# Altium PCB JTAG Breakout Breadboard.PcbDoc
Units mil, origin at the board's own origin, x right, y up, seen from the top; angles counter-clockwise.
Board outline 660 x 1300 mil, 2 copper layers (Top Layer, Bottom Layer), stack 61.756 mil thick; 3 components, 20 nets, 40 pads, 20 vias.
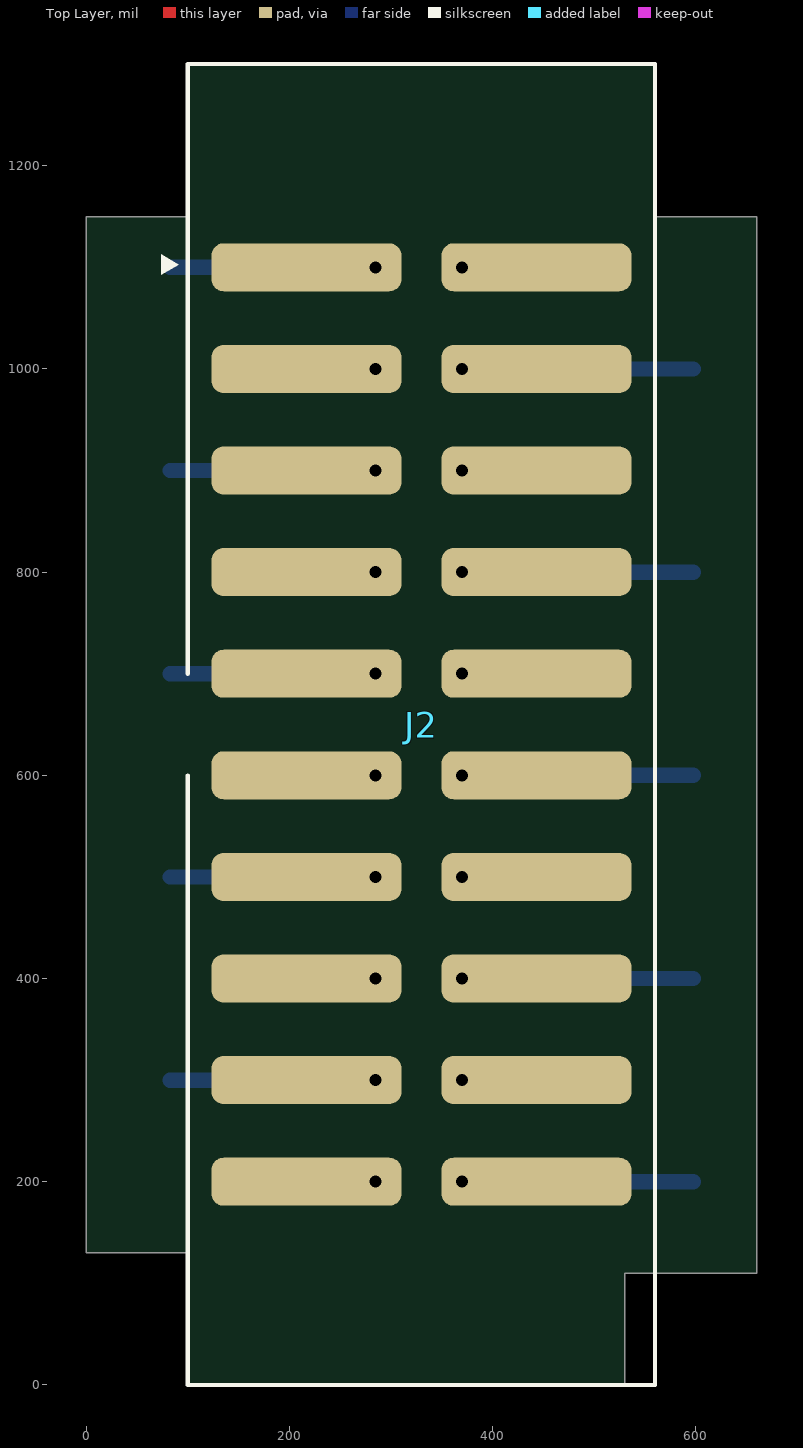
[diagram p0: Top Layer view]
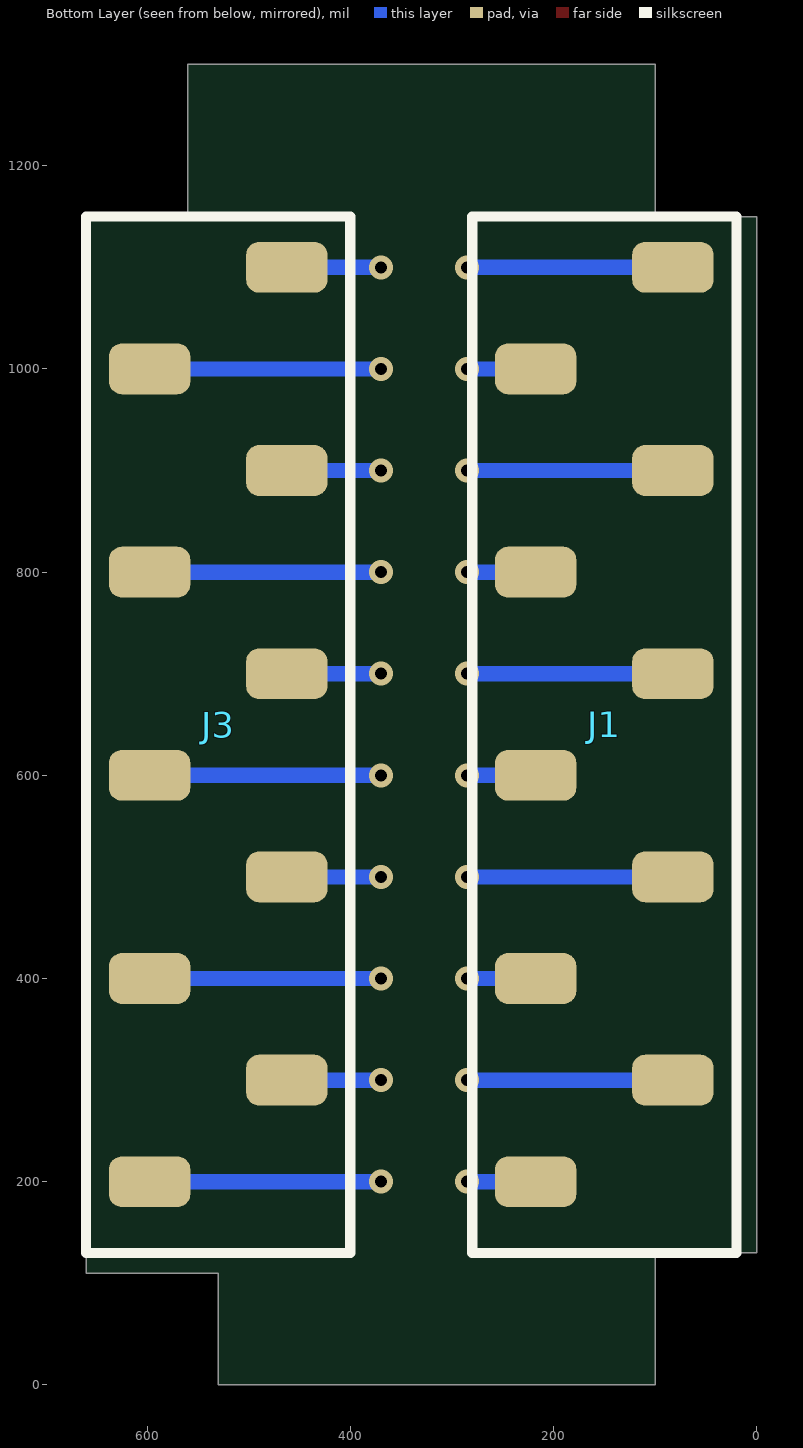
[diagram p1: Bottom Layer view, seen from below]

## Layer stack, top to bottom
Top Solder: solder mask 1, PSR-4000BN, Dk 4.5
Top Layer: signal copper 1.378
Dielectric 1: core 59, Kingboard KB6167F, Dk 4.5
Bottom Layer: signal copper 1.378
Bottom Solder: solder mask 1, PSR-4000BN, Dk 4.5

## Board outline
0,129.99 0,1149.99 100,1149.99 100,1299.99 560,1299.99 560,1149.99 660,1149.99 660,109.99 530,109.99 530,-0.01 100,-0.01 100,129.99

## Design rules (kind name [scope] priority, off if disabled: settings)
BoardOutlineClearance [All] p1: gap=7.87 ignorepadtopadclearanceinfootprint=FALSE
Clearance [All] p1: gap=5 ignorepadtopadclearanceinfootprint=FALSE except(9.84: Arc-Hole Track-Hole SMDPad-Hole THPad-Hole Via-Hole Fill-Hole Poly-Hole Region-Hole Text-Hole)
ComponentClearance [All] p1: gap=5 collisioncheckmode=3 verticalgap=5 showdistances=TRUE
DiffPairsRouting [All] p1: maxlimit=10 minlimit=5 mostfreqgap=5 toplayer_minwidth=5 toplayer_maxwidth=1000 toplayer_prefwidth=5 bottomlayer_minwidth=5 bottomlayer_maxwidth=1000 bottomlayer_prefwidth=5 maxuncoupledlength=500
Height [All] p1: minheight=0 maxheight=71497.94 prefheight=500
HoleSize [All] p1: absolutevalues=TRUE maxlimit=248.03 minlimit=11.81 maxpercent=80.000 minpercent=20.000
HoleToHoleClearance [All] p1: gap=9.84 allowstackedmicrovias=FALSE
MinimumAnnularRing [All] p1: minimumring=3
MinimumSolderMaskSliver [All] p1: minsoldermaskwidth=0
PlaneClearance [All] p1: clearance=5
PlaneConnect PlaneConnectPowerPads [InPadClass('PowerPads')] p1: planeconnectstyle=Direct reliefexpansion=20 reliefentries=4 reliefconductorwidth=10 reliefairgap=10
PlaneConnect [All] p2: pad.planeconnectstyle=Relief pad.reliefexpansion=11.81 pad.reliefentries=4 pad.reliefconductorwidth=5 pad.reliefairgap=5 via.planeconnectstyle=Direct via.reliefexpansion=11.81 via.reliefentries=4 via.reliefconductorwidth=5 via.reliefairgap=5
PolygonConnect PolygonConnectPowerPads [All vs (InPadClass('PowerPads'))] p1: connectstyle=Direct reliefconductorwidth=10 reliefentries=4 polygonreliefangle="90 Angle" airgapwidth=10
PolygonConnect [All] p2: thpad.connectstyle=Relief thpad.reliefconductorwidth=5 thpad.reliefentries=4 thpad.polygonreliefangle="90 Angle" thpad.airgapwidth=5 smdpad.connectstyle=Relief smdpad.reliefconductorwidth=5 smdpad.reliefentries=4 smdpad.polygonreliefangle="90 Angle" smdpad.airgapwidth=5 via.connectstyle=Direct via.reliefconductorwidth=5 via.reliefentries=4 via.polygonreliefangle="90 Angle" via.airgapwidth=5
RoutingVias [All] p1: holewidth=11.81 width=23.62 viastyle="Through Hole" minholewidth=11.81 minwidth=23.62 maxholewidth=23.62 maxwidth=259.84
SilkToSilkClearance [All] p1: silktosilkclearance=0
SilkToSolderMaskClearance [IsPad] p1: minsilkscreentomaskgap=5 clearancetoexposedcopper=TRUE
SolderMaskExpansion ViaTent [IsVia] p1: expansion=4 istentingtop=TRUE
SolderMaskExpansion [All] p2: expansion=4 istentingtop=FALSE
Width [All] p1: maxlimit=1000 minlimit=5 preferedwidth=5 minimp=50.000000 maximp=50.000000 favimp=50.000000
20 further rules are at their usual default settings.

## Components (designator, comment, footprint, x,y, rotation, side; value= is the part's Value field where it differs from the comment)
J1 "10 contacts Male header" 10129380-910001ALF 150,649.99 r270 bottom
J2 "Arm® JTAG 20 connector" "3020-20-0300-00 PLUGMID" 330,649.99 r90 top locked
J3 "10 contacts Male header" 10129380-910001ALF 530,649.99 r270 bottom locked

## Footprints (in the part's own frame and the unit in brackets; to place one, negate y for a bottom-side part, rotate by r counter-clockwise, add the part's x,y. Pads: shape width x height; smd on the part's side, far side on the other; paste and mask are expansions set on the pad)
"3020-20-0300-00 PLUGMID" [mm]
  rrect50% 1.2x4.75 smd: 1(11.43,2.875) 2(11.43,-2.875) 3(8.89,2.875) 4(8.89,-2.875) 5(6.35,2.875) 6(6.35,-2.875) 7(3.81,2.875) 8(3.81,-2.875) 9(1.27,2.875) 10(1.27,-2.875) 11(-1.27,2.875) 12(-1.27,-2.875) 13(-3.81,2.875) 14(-3.81,-2.875) 15(-6.35,2.875) 16(-6.35,-2.875) 17(-8.89,2.875) 18(-8.89,-2.875) 19(-11.43,2.875) 20(-11.43,-2.875)
  silkscreen extent -16.51,-5.84 16.51,6.5, body extent -16.51,-8.89 16.51,8.89, height 12.47
10129380-910001ALF [mil]
  rrect50% 50x80 smd: 1(-450,67.5) 2(-350,-67.5) 3(-250,67.5) 4(-150,-67.5) 5(-50,67.5) 6(50,-67.5) 7(150,67.5) 8(250,-67.5) 9(350,67.5) 10(450,-67.5)
  silkscreen extent -500,-130 520,130, body extent -500,-94 500,95, height 390

## Part data
J1 J3: library part 10129380-910001ALF, "Connector Male Header 1X10 vertical 10contacts 0.100in pitch Gold finish SMD", Manufacturer=FCI, Supplier Part Number 1=609-10129380-910001ALFCT-ND, ComponentLink1Description="Manufacturer Website", ComponentLink1URL=http://www.fci.com, ComponentLink2Description="Component Datasheet", ComponentLink2URL=https://cdn.amphenol-icc.com/media/wysiwyg/files/drawing/10129380.pdf, ComponentLink3Description="Octopart Link", ComponentLink3URL=https://octopart.com/10129380-910001alf-amphenol+icc+%2F+fci-87314063?r=sp, Contact Finish=Gold, Description in Visual="Con Hdr Male 10contacts vertical 1X10", Gender=Male, Manufacturer P/N=10129380-910001ALF, Number of Contacts=10, Number of Rows=1, Orientation=vertical, P/N=10129380-910001ALF, PCB Package=10129380-910001ALF, Pitch=0.100in, Supplier 1=Digi-Key
J2: library part "ARM Standard Debug SMD", "20 Pin Shrouded Header, 0.100\" SMD", Manufacturer="CNC Tech", Manufacturer P/N=Various, Supplier Part Number 1=1175-1623-ND, ComponentLink1Description="Pinout Reference", ComponentLink1URL=http://infocenter.arm.com/help/index.jsp?topic=/com.arm.doc.100893_0100_02_en/ris1452189032721.html, ComponentLink2Description="Datasheet for Connector", ComponentLink2URL=http://www.cnctech.us/pdfs/3020-XX-0300-00-TR.pdf, Contact Finish=Gold, Description in Visual="20 Pin Shrouded Header, 0.100\" SMD", Gender=Male, Number of Contacts=20, Number of Rows=2, Orientation=Vertical, P/N="ARM Standard Debug SMD", Pitch="0.100\"", Supplier 1=Digi-Key

## Via types
v1: diameter 23.62, hole 11.81, Top Layer to Bottom Layer, tented both sides, 20 vias

## Nets (pads, with @x,y where several pads share a name; then routed paths per layer and width w, separated by ;. In a path a pad name is that pad's centre, name@x,y a point inside that pad or via, vN(x,y) a via of type N, cw(c..) or ccw(c..) an arc to the next point about the centre after c; other vN are vias at no path point)
\SRST: J1.8 J2.15 | length 67.5
  Bottom Layer w15: J1.8 v1(285,399.99)
\TRST: J1.2 J2.3 | length 67.5
  Bottom Layer w15: J1.2 v1(285,999.99)
DBGACK: J1.10 J2.19 | length 67.5
  Bottom Layer w15: J1.10 v1(285,199.99)
DBGRQ: J1.9 J2.17 | length 202.5
  Bottom Layer w15: J1.9 v1(285,299.99)
GND1: J2.4 J3.2 | length 227.5
  Bottom Layer w15: v1(370,999.99) J3.2
GND2: J2.6 J3.3 | length 92.5
  Bottom Layer w15: v1(370,899.99) J3.3
GND3: J2.8 J3.4 | length 227.5
  Bottom Layer w15: v1(370,799.99) J3.4
GND4: J2.10 J3.5 | length 92.5
  Bottom Layer w15: v1(370,699.99) J3.5
GND5: J2.12 J3.6 | length 227.5
  Bottom Layer w15: v1(370,599.99) J3.6
GND6: J2.14 J3.7 | length 92.5
  Bottom Layer w15: v1(370,499.99) J3.7
GND7: J2.16 J3.8 | length 227.5
  Bottom Layer w15: v1(370,399.99) J3.8
GND8: J2.18 J3.9 | length 92.5
  Bottom Layer w15: v1(370,299.99) J3.9
GND9: J2.20 J3.10 | length 227.5
  Bottom Layer w15: v1(370,199.99) J3.10
RTCK: J1.6 J2.11 | length 67.5
  Bottom Layer w15: J1.6 v1(285,599.99)
SWCLK/TCLK: J1.5 J2.9 | length 202.5
  Bottom Layer w15: J1.5 v1(285,699.99)
SWDIO/TMS: J1.4 J2.7 | length 67.5
  Bottom Layer w15: J1.4 v1(285,799.99)
TDI: J1.3 J2.5 | length 202.5
  Bottom Layer w15: J1.3 v1(285,899.99)
TDO/SWO: J1.7 J2.13 | length 202.5
  Bottom Layer w15: J1.7 v1(285,499.99)
VCC: J1.1 J2.1 | length 202.5
  Bottom Layer w15: J1.1 v1(285,1099.99)
VCCO: J2.2 J3.1 | length 92.5
  Bottom Layer w15: v1(370,1099.99) J3.1

## Silkscreen, mask and mechanical layers (free items; w line width, h text height)
Board Outline:
  the board outline again, w2
CAM Title Block:
  drawing of 59 lines, arcs and shapes, not listed
  text "1" at 465.71,7111.59 h48.36
  text "2" at 3208.83,7111.59 h48.36
  text "3" at 5961.96,7111.59 h48.36
  text "4" at 8707.58,7111.59 h48.36
  text "A" at -807.46,6149.46 h48.36
  text "A" at 9993.26,6149.46 h48.36
  text "B" at -802.46,4024.25 h48.36
  text "B" at 9997.43,4024.25 h48.36
  text "C" at -803.3,1899.87 h48.36
  text "C" at 9996.6,1899.87 h48.36
  text "D" at -805.8,-225.34 h48.36
  text "D" at 9994.1,-225.34 h48.36
  text "Title:" at 6404.69,-306.21 h65.87
  text "'.Pcb_File_Name_No_Path'" at 6754.88,-327.32 h63.36
  text "*" at 6654.83,-420.43 h32.52
  text "*" at 6654.83,-480.46 h32.52
  text "Desc:" at 6404.69,-492.97 h42.52
  text "*" at 6654.83,-540.49 h32.52
  text "Letter" at 6604.8,-688.06 h42.52
  text "Auth:" at 7005.01,-688.06 h42.52
  text "Proj:" at 8104.76,-688.06 h42.52
  text "Size:" at 6404.69,-693.06 h42.52
  text ".ProjAuth" at 7254.65,-710.01 h42.52
  text ".ProjShrtName" at 8305,-710.01 h42.52
  text "1" at 8404.92,-827.72 h37.52
  text "1" at 8705.08,-827.72 h37.52
  text "Date:" at 6404.69,-833.97 h37.52
  text "'.ModifiedDate'" at 6654.83,-833.97 h37.52
  text "Time:" at 7405.22,-833.97 h37.52
  text "'.ModifiedTime'" at 7615.34,-833.97 h37.52
  text "Sheet" at 8104.76,-833.97 h37.52
  text "of" at 8555,-833.97 h37.52
  text "Repo:" at 6404.69,-924.01 h37.52
  text ".ProjGitURL" at 6655,-925.01 h37.52
  text "File:" at 6404.69,-1024.06 h37.52
  text "'.Pcb_File_Name'" at 6654.83,-1024.06 h37.52
  text "1" at 465.71,-1187.47 h48.36
  text "2" at 3208.83,-1187.47 h48.36
  text "3" at 5961.96,-1187.47 h48.36
  text "4" at 8707.58,-1187.47 h48.36